# Altium PCB DummyLoad_Rev1.PcbDoc
Units mil, origin at the board's own origin, x right, y up, seen from the top; angles counter-clockwise.
Board outline 1200 x 2250 mil, 2 copper layers (Top Layer, Bottom Layer); 13 components, 5 nets, 33 pads, 0 vias.
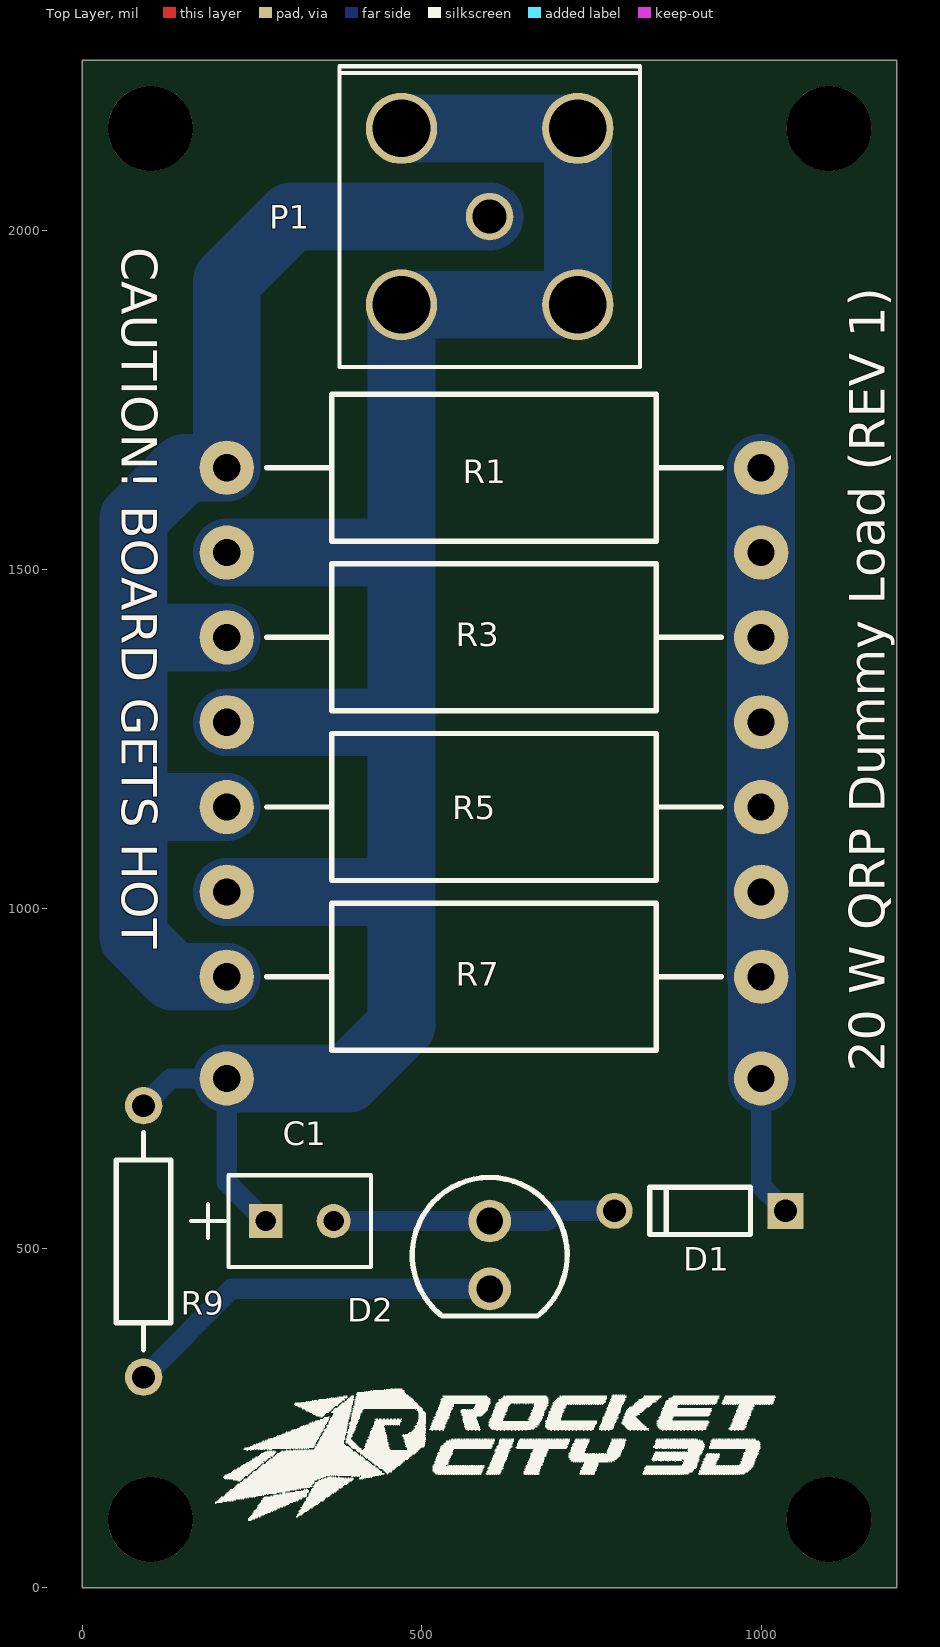
[diagram p0: Top Layer view]
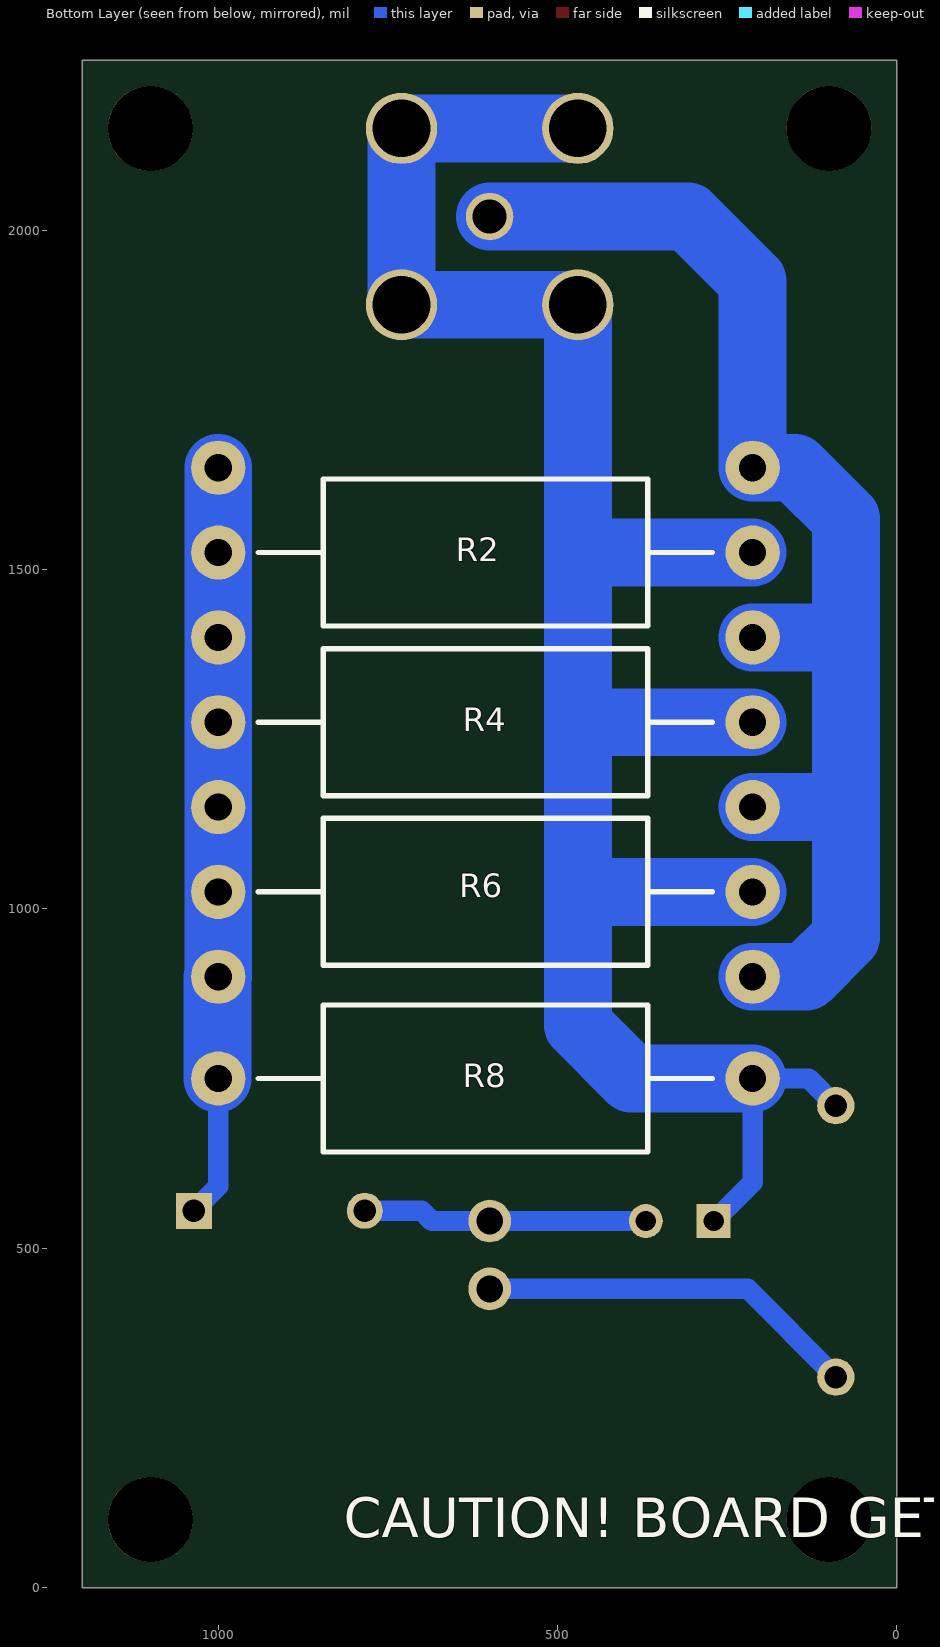
[diagram p1: Bottom Layer view, seen from below]

## Layer stack, top to bottom
Top Solder: solder mask 0.4, Solder Resist, Dk 3.5
Top Layer: signal copper 1.4
Dielectric 1: dielectric 12.6, FR-4, Dk 4.8
Bottom Layer: signal copper 1.4
Bottom Solder: solder mask 0.4, Solder Resist, Dk 3.5

## Board outline
0,0 0,2250 1200,2250 1200,0

## Design rules (kind name [scope] priority, off if disabled: settings)
Clearance [All] p1: gap=10 ignorepadtopadclearanceinfootprint=FALSE except(0: Arc-Hole Track-Hole SMDPad-Hole THPad-Hole Via-Hole Fill-Hole Poly-Hole Region-Hole Text-Hole)
PolygonConnect [All] p1: connectstyle=Relief reliefconductorwidth=10 reliefentries=4 polygonreliefangle="90 Angle" airgapwidth=10
RoutingVias [All] p1: holewidth=28 width=50 viastyle="Through Hole" minholewidth=28 minwidth=50 maxholewidth=28 maxwidth=50
SolderMaskExpansion [All] p1: expansion=4
Width [All] p1: maxlimit=200 minlimit=10 preferedwidth=10 minimp=50.000000 maximp=50.000000 favimp=50.000000
30 further rules are at their usual default settings.

## Components (designator, comment, footprint, x,y, rotation, side; value= is the part's Value field where it differs from the comment)
C1 "CAP" CAP_AR20 370,540 r0 top value=0.1uF
D1 "Diode" STM-DO-35-2 910,555 r180 top value=1N5711
D2 "LED" "Type 5mm" 600,490 r270 top
P1 "CONN_BNC" CONN_5-1634513-1 600,2020 r0 top
R1 "R" "Axial 0.8" 1000,1650 r180 top value=100
R2 "R" "Axial 0.8" 212.6,1525 r0 bottom value=100
R3 "R" "Axial 0.8" 1000,1400 r180 top value=100
R4 "R" "Axial 0.8" 212.6,1275 r0 bottom value=100
R5 "R" "Axial 0.8" 1000,1150 r180 top value=100
R6 "R" "Axial 0.8" 212.6,1025 r0 bottom value=100
R7 "R" "Axial 0.8" 1000,900 r180 top value=100
R8 "R" "Axial 0.8" 212.6,750 r0 bottom value=100
R9 "" AXIAL-0.4 90,510 r270 top value=10K

## Footprints (in the part's own frame and the unit in brackets; to place one, negate y for a bottom-side part, rotate by r counter-clockwise, add the part's x,y. Pads: shape width x height; smd on the part's side, far side on the other; paste and mask are expansions set on the pad)
"Axial 0.8" [mil]
  round 80 hole 40: 1(0,0) 2(787.4,0)
  silkscreen extent 59,-108 728,108
AXIAL-0.4 [mm] "Axial Device, Thru-Hole; 2 Leads; 0.4 in Pin Spacing"
  round 1.4 hole 0.85: 1(-5.08,0) 2(5.08,0)
  silkscreen extent -4.06,-1.02 4.06,1.02
CAP_AR20 [mil]
  rect 50x50 hole 30 mask+0: 1(-100,0)
  round 50 hole 30 mask+0: 2(0,0)
  silkscreen extent -210,-68 55,68, body extent 0,0 10,10, height 10
CONN_5-1634513-1 [mil]
  round 70 hole 50 mask+0: 1(0,0)
  round 105 hole 85 mask+0: 2(-129.92,129.92) 3(-129.92,-129.92) 4(129.92,-129.92) 5(129.92,129.92)
  silkscreen extent -222,-222 222,222, body extent -212,-214 212,893, height 459
STM-DO-35-2 [mm] "THD, 2-Leads, Dia 1.765 mm, Body Length 3.775 mm"
  rect 1.35x1.35 hole 0.85: 1(-3.2,0)
  round 1.35 hole 0.85: 2(3.2,0)
  silkscreen extent -1.89,-0.88 1.89,0.88, body extent -1.89,-0.88 1.89,0.88, height 1.76
"Type 5mm" [mm] "THT, LED-5mm, 2pin- Body 5.8mm"
  round 1.6 hole 1: 1(1.27,0) 2(-1.27,0)
  silkscreen extent -2.9,-2.9 2.29,2.9, body extent -2.9,-2.9 2.5,2.9, height 11.7

## Part data
C1: Capacitance=100nF, Case/Package=Dipped, Dielectric=Z5U, Manufacturer 1="Kyocera AVX", Manufacturer Part Number 1=SR205E104MAR, Max Operating Temperature=85°C, Min Operating Temperature=10°C, Package Quantity=1000, Supplier Part Number 1=478-3192-ND, Temperature Coefficient=30ppm/°C, Tolerance=20%, voltage=50V, ComponentLink1Description=https://datasheet.ciiva.com/34301/767682-34301506.pdf?src-supplier=Jameco, ComponentLink1URL=https://datasheet.ciiva.com/34301/767682-34301506.pdf?src-supplier=Jameco, ComponentLink2Description=https://datasheet.ciiva.com/11786/0900766b8064818e-11786605.pdf?src-supplier=RSComponents, ComponentLink2URL=https://datasheet.ciiva.com/11786/0900766b8064818e-11786605.pdf?src-supplier=RSComponents, ComponentLink3Description=https://datasheet.ciiva.com/2990/skycap-sr-2990033.pdf?src-supplier=Avnet, ComponentLink3URL=https://datasheet.ciiva.com/2990/skycap-sr-2990033.pdf?src-supplier=Avnet, ComponentLink4Description=https://datasheet.ciiva.com/154/skycap-154474.pdf?src-supplier=Digi-Key, ComponentLink4URL=https://datasheet.ciiva.com/154/skycap-154474.pdf?src-supplier=Digi-Key, ComponentLink5Description=https://datasheet.ciiva.com/7916/1897122-7916327.pdf?src-supplier=Element14, ComponentLink5URL=https://datasheet.ciiva.com/7916/1897122-7916327.pdf?src-supplier=Element14, ComponentLink6Description=https://datasheet.ciiva.com/14585/70195658-14585210.pdf?src-supplier=Allied+Electronics, ComponentLink6URL=https://datasheet.ciiva.com/14585/70195658-14585210.pdf?src-supplier=Allied+Electronics, ComponentLink7Description=https://datasheet.ciiva.com/16204/skycap-sr-16204908.pdf?src-supplier=Future+Electronics, ComponentLink7URL=https://datasheet.ciiva.com/16204/skycap-sr-16204908.pdf?src-supplier=Future+Electronics, Depth=3.175mm, Height=5.08mm, Height - Seated (Max)=0.2inch, Lead/Base Style=Straight, Lead Diameter=0.508mm, Lead Free="Lead Free", Lead Length=1mm, Lead Pitch=2.54mm, Length=5.08mm, Mount="Through Hole", Number of Pins=2, Packaging=Bulk, Radiation Hardening=No, REACH SVHC="No SVHC", Supplier 1=Digi-Key, Termination=Radial, Thickness=3.17mm, Voltage Rating=50V, Voltage Rating (DC)=50V, Width=3.175mm
D1: "Small Signal Schottky Diode, 70 V, -65 to 200 degC, 2-Pin THD (DO-35), RoHs, Tape and Reel", Breakdown Voltage=70V, Current Rating=15mA, Diode Case Style=DO-204AH, Forward Surge Current Ifsm Max=-, Forward Voltage=1V, Forward Voltage VF Max=410mV, Manufacturer=STMicroelectronics, Manufacturer Part Number 1=1N5711, Max Operating Temperature=200°C, Max Power Dissipation=430mW, Max Reverse Leakage Current=200nA, Min Operating Temperature=-65°C, Package Description="2-Pin Axial Lead, Dia 1.765 mm, Body Length 3.775 mm", Package Quantity=1, Package Reference=DO-35-2, Supplier Part Number 1=497-2499-1-ND, Automotive Qualification Standard=-, ComponentLink1Description=https://datasheet.ciiva.com/15144/getdatasheetpartid-82812-15144534.pdf?src-supplier=Verical, ComponentLink1URL=https://datasheet.ciiva.com/15144/getdatasheetpartid-82812-15144534.pdf?src-supplier=Verical, ComponentLink2Description=https://datasheet.ciiva.com/4714/cd00000759-106159-4714153.pdf?src-supplier=Mouser, ComponentLink2URL=https://datasheet.ciiva.com/4714/cd00000759-106159-4714153.pdf?src-supplier=Mouser, ComponentLink3Description=https://datasheet.ciiva.com/1178/1693751-1178459.pdf?src-supplier=Element14, ComponentLink3URL=https://datasheet.ciiva.com/1178/1693751-1178459.pdf?src-supplier=Element14, ComponentLink4Description=https://datasheet.ciiva.com/1178/1470783-1178460.pdf?src-supplier=Element14, ComponentLink4URL=https://datasheet.ciiva.com/1178/1470783-1178460.pdf?src-supplier=Element14, ComponentLink5Description=https://datasheet.ciiva.com/26338/155459-da-01-en-diode-1n5711-stm-26338799.pdf?src-supplier=Conrad, ComponentLink5URL=https://datasheet.ciiva.com/26338/155459-da-01-en-diode-1n5711-stm-26338799.pdf?src-supplier=Conrad, ComponentLink6Description=https://datasheet.ciiva.com/14557/70013815-14557671.pdf?src-supplier=Allied+Electronics, ComponentLink6URL=https://datasheet.ciiva.com/14557/70013815-14557671.pdf?src-supplier=Allied+Electronics, ComponentLink7Description=https://datasheet.ciiva.com/6365/cd00000759-6365917.pdf?src-supplier=Digi-Key, ComponentLink7URL=https://datasheet.ciiva.com/6365/cd00000759-6365917.pdf?src-supplier=Digi-Key, ComponentLink8Description=https://datasheet.ciiva.com/6365/cd00000759-6365918.pdf?src-supplier=Digi-Key, ComponentLink8URL=https://datasheet.ciiva.com/6365/cd00000759-6365918.pdf?src-supplier=Digi-Key, Contact Plating=Tin, Datasheet URL=http://www.st.com/content/ccc/resource/technical/document/datasheet/a8/9d/10/57/ac/a3/4f/81/CD00000759.pdf/files/CD00000759.pdf/jcr:content/translations/en.CD00000759.pdf, Datasheet Version=10/2001, Diameter=2mm, Diode Configuration=Single, Element Configuration=Single, Forward Current=15mA, Forward Current If(AV)=15mA, Height=2mm, Lead Free="Lead Free", Length=4.5mm, Manufacturer 1=STMicroelectronics, Manufacturer URL=http://www.st.com/, Max Current Rating=15mA, Max Repetitive Reverse Voltage (Vrrm)=70V, Mount="Through Hole", Mounting Technology=ThroughHole, No. of Pins=2Pins, Number of Pins=2, Operating Temperature Max=200°C, Output Current=15mA, Outside Diameter=1.93mm, Packaging=Tape&Reel, Peak Reverse Current=200nA, Polarity=Standard, Power Dissipation=430mW, Product Range=1N5711Series, Radiation Hardening=No, REACH SVHC="No SVHC", Repetitive Reverse Voltage Vrrm Max=70V, Reverse Recovery Time=100ps, Reverse Voltage (DC)=70V, Supplier 1=Digi-Key, SVHC=NoSVHC(17-Dec-2015), Termination=Axial, Voltage Rating (DC)=70V, Weight=0.01lb, Width=2mm
D2: "THT LED round mono-color color lens, WL-TMRW, Red", Case/Package=Radial, Color=Red, Forward Current=30mA, Forward Voltage=2.1V, Manufacturer="Wuerth Elektronik", Manufacturer 1="Wurth Electronics", Manufacturer Part Number 1=151051RS11000, Max Operating Temperature=85°C, Min Operating Temperature=-40°C, Package Quantity=1, Supplier Part Number 1=732-5016-ND, Test Current=20mA, ComponentLink1Description="Manufacturer URL", ComponentLink1URL=http://www.we-online.com, ComponentLink2Description=Datasheet, ComponentLink2URL=http://katalog.we-online.de/pbs/datasheet/7448042001.pdfhttp://katalog.we-online.de/pbs/datasheet/7448042001.pdfhttp://katalog.we-online.de/pbs/datasheet/7448042001.pdfhttp://katalog.we-online.de/pbs/datasheet/151051RS11000.pdf, ComponentLink3Description=https://datasheet.ciiva.com/23843/151051rs11000-23843281.pdf?src-supplier=Newark, ComponentLink3URL=https://datasheet.ciiva.com/23843/151051rs11000-23843281.pdf?src-supplier=Newark, ComponentLink4Description=https://datasheet.ciiva.com/29335/759488-da-01-en-tht-led-5mm-rot-151051rs11000-29335455.pdf?src-supplier=Conrad, ComponentLink4URL=https://datasheet.ciiva.com/29335/759488-da-01-en-tht-led-5mm-rot-151051rs11000-29335455.pdf?src-supplier=Conrad, ComponentLink5Description=https://datasheet.ciiva.com/22657/1911506-22657034.pdf?src-supplier=Element14, ComponentLink5URL=https://datasheet.ciiva.com/22657/1911506-22657034.pdf?src-supplier=Element14, ComponentLink6Description=https://datasheet.ciiva.com/29562/151051rs11000-29562906.pdf?src-supplier=Digi-Key, ComponentLink6URL=https://datasheet.ciiva.com/29562/151051rs11000-29562906.pdf?src-supplier=Digi-Key, Dominant Wavelength=645nm, Emitting color=Red, Height=8.9mm, Lens Size=5mm, Lens Style=Diffused, Luminous Intensity=30mcd, Mount="Through Hole", PackageReference="Type 5mm", PartNumber=151051RS11000, REACH SVHC=Unknown, Supplier 1=Digi-Key, Viewing Angle=60°, WaveLength=630nm
R1 R2 R3 R4 R5 R6 R7 R8: "Resistor", Case/Package=Conformal, Manufacturer 1=Panasonic, Manufacturer Part Number 1=ERG-3SJ101V, Max Operating Temperature=200°C, Max Power Dissipation=3W, Min Operating Temperature=-55°C, Package Quantity=1000, Resistance=100R, Supplier Part Number 1=P100W-3CT-ND, Temperature Coefficient=300ppm/°C, Tolerance=5%, Voltage Rating=700V, ComponentLink1Description=https://datasheet.ciiva.com/26914/getdatasheetpartid-170686-26914097.pdf?src-supplier=Verical, ComponentLink1URL=https://datasheet.ciiva.com/26914/getdatasheetpartid-170686-26914097.pdf?src-supplier=Verical, Composition="Metal Oxide", Contact Plating=Tin, Diameter=5.5mm, Lead Diameter=0.8mm, Length=15mm, Military Standard=Not, Mount="Through Hole", Number of Terminations=2, Packaging="Ammo Pack", Power Rating=3W, Radiation Hardening=No, Supplier 1=Digi-Key, Termination=Axial
R9: library part Res2, "Resistor", Case/Package=Axial, Manufacturer 1=Yageo, Manufacturer Part Number 1=CFR-25JB-52-10K, Max Operating Temperature=155°C, Max Power Dissipation=250mW, Min Operating Temperature=-55°C, Package Quantity=200, Resistance=10kR, Supplier Part Number 1=10KQBK-ND, Temperature Coefficient=500ppm/°C, Tolerance=5%, ComponentLink1Description=http://components.arrow.com/part/dataview/0323_07021247?src-supplier=Arrow+Europe, ComponentLink1URL=http://components.arrow.com/part/dataview/0323_07021247?src-supplier=Arrow+Europe, ComponentLink2Description=http://www.yageo.com/NewPortal/yageodocoutput?fileName=/pdf/throughhole/Yageo_LR_CFR_2013.pdf&src-supplier=Digi-Key, ComponentLink2URL=http://www.yageo.com/NewPortal/yageodocoutput?fileName=/pdf/throughhole/Yageo_LR_CFR_2013.pdf&src-supplier=Digi-Key, Composition="Carbon Film", LatestRevisionDate=17-Jul-2002, LatestRevisionNote="Re-released for DXP Platform.", Lead Free="Lead Free", Length=0.248inch, Number of Terminations=2, PackageDescription="Axial Device, Thru-Hole; 2 Leads; 0.4 in Pin Spacing", PackageReference=AXIAL-0.4, Packaging=Bulk, Published=8-Jun-2000, Publisher="Altium Limited", Supplier 1=Digi-Key

## Free pads (board coordinates)
  round 125 hole 125 unplated: ""(100,100) ""(100,2150) ""(1100,100) ""(1100,2150)

## Nets (pads, with @x,y where several pads share a name; then routed paths per layer and width w, separated by ;. In a path a pad name is that pad's centre, name@x,y a point inside that pad or via, vN(x,y) a via of type N, cw(c..) or ccw(c..) an arc to the next point about the centre after c; other vN are vias at no path point)
NetC1_1: C1.1 P1.2 P1.3 P1.4 P1.5 R2.1 R4.1 R6.1 R8.1 R9.1 | length 3278.4
  Bottom Layer w30: R9.1 130,750 R8.1 212.6,597.4 C1.1
  Bottom Layer w100: R8.1 391.42,750 470.08,828.66 470.08,1025 ; R6.1 470.08,1025 ; R4.1 470.08,1275 ; R2.1 465.16,1525 ; P1.2 P1.5 P1.4 P1.3 470.08,1529.92 465.16,1525 ; 465.16,1525 470.08,1525 470.08,1275 ; 470.08,1025 470.08,1275
NetC1_2: C1.2 D1.2 D2.2 | length 420.2
  Bottom Layer w30: C1.2 D2.2 685,540 700,555 D1.2
NetD1_1: D1.1 R1.1 R2.2 R3.1 R4.2 R5.1 R6.2 R7.1 R8.2 | length 1111.3
  Bottom Layer w30: R8.2@1000.98,750 R8.2 1000,590.98 D1.1
  Bottom Layer w100: R1.1 R2.2 R3.1 R4.2 R5.1 R6.2 R7.1 1000.98,899.02 R8.2@1000.98,750
NetD2_1: D2.1 R9.2 | length 563.8
  Bottom Layer w30: R9.2 220,440 D2.1
NetP1_1: P1.1 R1.2 R3.2 R5.2 R7.2 | length 1923.9
  Bottom Layer w100: R7.2 133.58,900 75,958.58 75,1150 ; R5.2 75,1150 ; R3.2 75,1400 ; P1.1 307.6,2020 212.6,1925 R1.2 150,1650 75,1575 75,1400 ; 75,1150 75,1400

## Silkscreen, mask and mechanical layers (free items; w line width, h text height)
Top Overlay:
  drawing of 20 lines, arcs and shapes, not listed
  text "CAUTION! BOARD GETS HOT" at 40,1975 h90 r270
  text "20 W QRP Dummy Load (REV 1)" at 1200,760 h90 r90
Bottom Overlay:
  text "CAUTION! BOARD GETS HOT" at 815,55 h100
OUTLINE:
  the board outline again, w8

## Text inside footprints (layer, text, board x,y; h text height)
D2: Mechanical 15 "K" at 585,370 h30 r270